# Altium PCB Sinistro_TestBed_RevA-1.PcbDoc (part 2 of 4)
Units mil, origin at the board's own origin, x right, y up, seen from the top; angles counter-clockwise.
Board outline 17000 x 8000 mil, 7 copper layers (Top Layer (*.GTL), MidLayer1 (*.G1), MidLayer2 (*.G2), MidLayer3 (*.G3), DIG GND (*.GP1), AGND (*.GP2), Bottom Layer (*.GBL)); 262 components, 309 nets, 2223 pads, 663 vias.
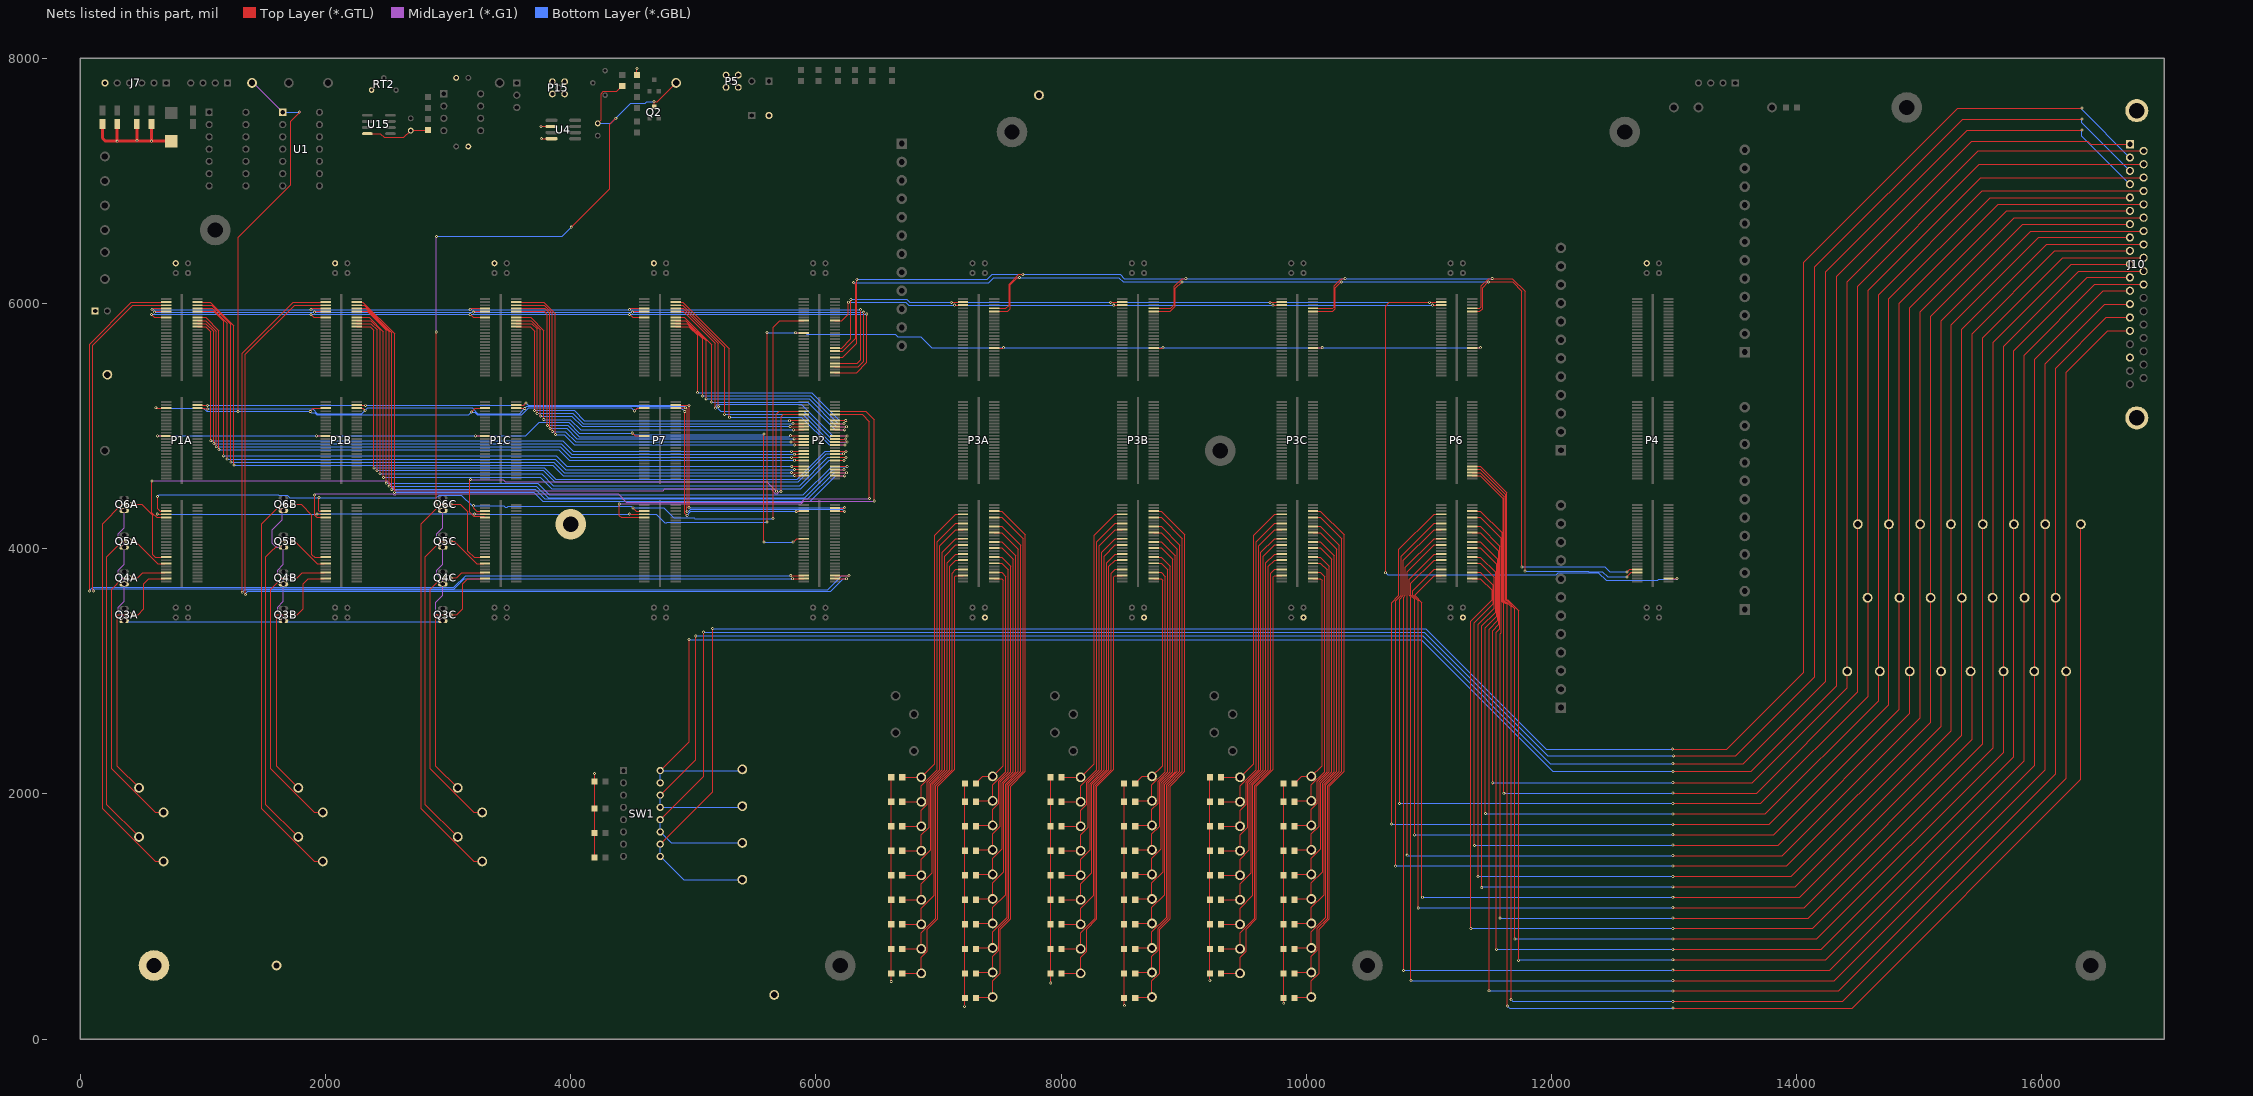
[diagram p7: the nets of this part, all layers, seen from the top]

## Via types
v1: diameter 24, hole 10, Top Layer (*.GTL) to Bottom Layer (*.GBL), 662 vias
v2: diameter 10, hole 10, Top Layer (*.GTL) to Bottom Layer (*.GBL), 1 vias

## Nets (pads, with @x,y where several pads share a name; then routed paths per layer and width w, separated by ;. In a path a pad name is that pad's centre, name@x,y a point inside that pad or via, vN(x,y) a via of type N, cw(c..) or ccw(c..) an arc to the next point about the centre after c; other vN are vias at no path point) (continued)
A: C1A.2 C1B.2 C1C.2 C2A.2 C2B.2 C2C.2 C3A.2 C3B.2 C3C.2 C4A.2 C4B.2 C4C.2 C5A.2 C5B.2 C5C.2 C6A.2 C6B.2 C6C.2 C7A.2 C7B.2 C7C.2 C8A.2 C8B.2 C8C.2 C9A.2 C9B.2 C9C.2 C10A.2 C10B.2 C10C.2 C11A.2 C11B.2 C11C.2 C12A.2 C12B.2 C12C.2 C13A.2 C13B.2 C13C.2 C14A.2 C14B.2 C14C.2 C15A.2 C15B.2 C15C.2 C16A.2 C16B.2 C16C.2 C17A.2 C17B.2 C17C.2 C18A.2 C18B.2 C18C.2 C19A.2 C19B.2 C19C.2 C58.1 C69.1 C70.1 C81.NEG C82.2 C83.1 C84.2 C85.1 D2.1 J7.6 J9.1 J10.17 J10.38 J10.39 P1A.PC07 P1B.PC07 P1C.PC07 P3A.PC07 P3B.PC07 P3C.PC07 P4.PC07 P5.2 P5.3 P5.4 P5.5 P6.PC07 P7.PC07 P15.2 P15.3 P15.4 P15.5 pad.0@600,600 R2.1 R4.1 R8.1 R9.1 R10.1 R11.1 RT2.1 TP114.1 TP115.1 TP116.1 TP117.1 U4.2 U4.4 U15.4 | length 12977.4
  Top Layer (*.GTL) w10: U15.4@2340.51,7386 2447,7386 2478,7355 2639,7355 C58.1@2695,7411 2700,7416 R2.1@2835,7416 ; v1(3757,7446) 3758,7445 U4.2@3843.54,7445 ; v1(3760,7345) U4.4@3843.54,7345 ; v1(4194,2167) 4195,2166 R11.1@4195,1480 ; R4.1@4540,7865 v1(4540,7917) ; v1(6615,470) C11A.2@6615,2136 ; v1(7213,267) 7215,269 C10A.2@7215,2086 ; C11B.2@7915,2136 7915,458 v1(7916,457) ; C10B.2@8515,2086 8515,275 v1(8518,272) ; v1(9214,479) 9215,480 C11C.2@9215,2136 ; C10C.2@9815,2086 9815,294 v1(9817,292)
  Top Layer (*.GTL) w25: C85.1@180,7465 180,7350 205,7325 v1(300,7325) ; C84.2@300,7465 v1(300,7325) ; C83.1@460,7465 460,7330 v1(461,7329) ; C82.2@580,7465 580,7326 v1(581,7325) ; C81.NEG@740,7325 v1(300,7325)
A1OUT: J10.1 SW1.15 SW1.16 TP50.1 | length 18239.5
  Top Layer (*.GTL) w5: v1(12992,2183.08) 13629.92,2183.08 14328,2881.16 14328,6224 15429,7325 16375,7325 16400,7300 J10.1@16720,7300
  Top Layer (*.GTL) w10: SW1.16@4730,2190 4965,2425 v1(4965,3259)
  Bottom Layer (*.GBL) w5: v1(4965,3259) 10937,3259 12012.92,2183.08 v1(12992,2183.08)
  Bottom Layer (*.GBL) w10: SW1.15@4730,2090 SW1.16@4730,2190 5390,2190 TP50.1@5400,2200
A2OUT: J10.4 SW1.13 SW1.14 TP51.1 | length 18635.4
  Top Layer (*.GTL) w5: v1(12991,2246.72) 13566.28,2246.72 14238,2918.44 14238,6261.28 15391.72,7415 v1(16328,7415)
  Top Layer (*.GTL) w10: SW1.14@4730,1990 5020,2280 5020,2538 v1(5020,3289)
  Bottom Layer (*.GBL) w5: v1(5020,3289) 10949.43,3289 11991.71,2246.72 v1(12991,2246.72) ; TP51.1@5390,1890 TP51.1@5400,1900 ; v1(16328,7415) 16328,7365.9 J10.4@16720,6973.9
  Bottom Layer (*.GBL) w10: SW1.14@4730,1990 SW1.13@4730,1890 TP51.1@5390,1890
A3OUT: J10.3 SW1.11 SW1.12 TP52.1 | length 18839.4
  Top Layer (*.GTL) w5: v1(12995,2310.36) 13502.64,2310.36 14148,2955.72 14148,6298.56 15354.44,7505 v1(16328,7505)
  Top Layer (*.GTL) w10: SW1.12@4730,1790 5084,2144 v1(5084,3319)
  Bottom Layer (*.GBL) w5: v1(5084,3319) 10961.85,3319 11970.49,2310.36 v1(12995,2310.36) ; v1(16328,7505) 16328,7474.6 J10.3@16720,7082.6
  Bottom Layer (*.GBL) w10: SW1.12@4730,1790 SW1.11@4730,1690 4820,1600 TP52.1@5400,1600
A4OUT: J10.2 SW1.9 SW1.10 TP53.1 | length 19058.6
  Top Layer (*.GTL) w5: v1(12987,2365.64) 13430.64,2365.64 14058,2993 14058,6335.84 15317.16,7595 v1(16328,7595)
  Top Layer (*.GTL) w10: SW1.10@4730,1590 5158,2018 5158,2544 ; 5158,2538 5158,2544 ; v1(5158,3349) 5158,2544
  Bottom Layer (*.GBL) w5: v1(5158,3349) 10974.28,3349 11957.64,2365.64 v1(12987,2365.64) ; v1(16328,7595) 16328,7583.3 J10.2@16720,7191.3
  Bottom Layer (*.GBL) w10: SW1.10@4730,1590 SW1.9@4730,1490 4920,1300 TP53.1@5400,1300
A_INTERFACE_RESET_N: P1A.47 P1B.47 P1C.47 P2.141 P7.47 | length 7537.8
  Top Layer (*.GTL) w5: v1(4507,4334) 4534.74,4306.26 P7.47@4600.4,4306.26 ; v1(5651,4245) 5651,5807 5705.57,5861.58 P2.141@5900.4,5861.58
  Top Layer (*.GTL) w10: v1(629,4426) 629,4327 649.74,4306.26 P1A.47@700.4,4306.26 ; v1(1946,4417) 1946,4308 1947.74,4306.26 P1B.47@2000.4,4306.26 ; v1(3207,4351) 3207,4332 3232.74,4306.26 P1C.47@3300.4,4306.26
  Bottom Layer (*.GBL) w5: v1(629,4426) 643,4440 1614,4440 1616.04,4437.96 1686.74,4437.96 1707.69,4417 v1(1946,4417) 2904.72,4417 2925.67,4437.96 3108.04,4437.96 3195,4351 v1(3207,4351) 3454.1,4351 3467.34,4337.76 3482.66,4337.76 3490.9,4346 4495,4346 v1(4507,4334) 4759.84,4334 4842.34,4251.5 5006.5,4251.5 5012,4246 5650,4246 v1(5651,4245)
A_SCLK: P1A.143 P1B.143 P1C.143 P2.108 P7.143 | length 7048.4
  Top Layer (*.GTL) w5: v1(580,5910) 603.42,5886.58 P1A.143@700.4,5886.58 ; v1(1880,5911.5) 1904.92,5886.58 P1B.143@2000.4,5886.58 ; v1(3180,5911.5) 3204.93,5886.58 P1C.143@3300.4,5886.58 ; v1(4480,5911.5) 4504.93,5886.58 P7.143@4600.4,5886.58 ; P2.108@6155.52,5436.58 6331.57,5436.58 6415,5520 v1(6415,5915)
  Bottom Layer (*.GBL) w5: v1(580,5910) 581.5,5911.5 6411.5,5911.5 v1(6415,5915)
A_SIMO: P1A.147 P1B.147 P1C.147 P2.112 P7.147 | length 6824.8
  Top Layer (*.GTL) w5: v1(605,5930) 611.58,5936.58 P1A.147@700.4,5936.58 ; v1(1910,5930) 1916.58,5936.58 P1B.147@2000.4,5936.58 ; v1(3205,5930) 3211.57,5936.58 P1C.147@3300.4,5936.58 ; v1(4505,5930) 4511.57,5936.58 P7.147@4600.4,5936.58 ; P2.112@6155.52,5486.58 6346.22,5486.58 6390,5530.36 v1(6390,5930)
  Bottom Layer (*.GBL) w5: v1(605,5930) v1(1910,5930) v1(6390,5930)
A_SOMI: P1A.149 P1B.149 P1C.149 P2.114 P7.149 | length 6906.6
  Top Layer (*.GTL) w5: v1(585,5950) 596.58,5961.58 P1A.149@700.4,5961.58 ; v1(1880,5950) 1891.58,5961.58 P1B.149@2000.4,5961.58 ; v1(3180,5950) 3191.57,5961.58 P1C.149@3300.4,5961.58 ; v1(4480,5950) 4491.57,5961.58 P7.149@4600.4,5961.58 ; P2.114@6155.52,5511.58 6335.86,5511.58 6365,5540.71 v1(6365,5950)
  Bottom Layer (*.GBL) w5: v1(585,5950) v1(6365,5950)
"ANALOG CLOCK DRIVES.P1A_DR": J10.27 P6.152 TP19.1 | length 12813.2
  Top Layer (*.GTL) w5: v1@10944,1157 10944,3559 10884,3619 10884,3622.46 11043,3781.46 P6.152@11100.4,3781.46
  Top Layer (*.GTL) w10: v1(12991,1157) 14025.92,1157 15349,2480.08 TP19.1@15349,3600 15349,5791.08 16040.57,6482.65 J10.27@16831.81,6482.65
  Bottom Layer (*.GBL) w10: v1(12991,1157) v1(10948,1157) ; v1(10948,1157) 10944,1153 v1(10948,1157)
"ANALOG CLOCK DRIVES.P1B_DR": J10.24 P6.142 TP20.1 | length 12405.5
  Top Layer (*.GTL) w5: v1@10884,1667 10884,3589 10854,3619 10854,3717.46 11043,3906.46 P6.142@11100.4,3906.46
  Top Layer (*.GTL) w10: v1(12991,1667) 13814.67,1667 14839,2691.33 14839,6002.33 15646.32,6809.65 J10.24@16831.81,6809.65
  Bottom Layer (*.GBL) w10: v1(10884,1666) 10885,1667 v1(12991,1667)
"ANALOG CLOCK DRIVES.P2A_DR": J10.25 P6.132 TP21.1 | length 12783.6
  Top Layer (*.GTL) w5: v1(10824,1500) 10824,3812.46 11043,4031.46 P6.132@11100.4,4031.46
  Top Layer (*.GTL) w10: v1(12991,1497) 13885.09,1497 15009,2620.91 15009,5931.91 15777.74,6700.65 J10.25@16831.81,6700.65
  Bottom Layer (*.GBL) w10: v1(10824,1500) 10827,1497 v1(12991,1497)
"ANALOG CLOCK DRIVES.P2B_DR": J10.22 P6.122 TP22.1 | length 12533.1
  Top Layer (*.GTL) w5: v1(10761.5,1922) 10761.5,3589 10791.5,3619 10791.5,3904.96 11043,4156.46
  Top Layer (*.GTL) w10: 11043,4156.46 P6.122@11100.4,4156.46 ; v1(12991,1922) 13709.05,1922 14584,2796.95 14584,6107.95 15503.7,7027.65 J10.22@16831.81,7027.65
  Bottom Layer (*.GBL) w10: v1(10761.5,1922) v1(12991,1922)
"ANALOG CLOCK DRIVES.P3A_DR": J10.10 P6.153 TP32.1 | length 12594.5
  Top Layer (*.GTL) w5: v1@11342,902 11342,3407 11518,3583 11518,3659.46 11421,3756.46 P6.153@11355.52,3756.46
  Top Layer (*.GTL) w10: v1(12991,902) 14131.54,902 15604,2374.46 15604,5685.46 16240.24,6321.69 J10.10@16720,6321.69
  Bottom Layer (*.GBL) w10: v1(11343,902) v1(12991,902)
"ANALOG CLOCK DRIVES.P3B_DR": J10.26 P6.143 TP33.1 | length 12281.9
  Top Layer (*.GTL) w5: P6.143@11355.52,3881.46 11421,3881.46 11536,3766.46 11536,3516.15 11402,3382.15 v1@11402,1319
  Top Layer (*.GTL) w10: v1(12991,1327) 13955.5,1327 15179,2550.5 15179,5861.5 15909.15,6591.65 J10.26@16831.81,6591.65
  Bottom Layer (*.GBL) w5: v1(11402,1325) v1@11404,1327
  Bottom Layer (*.GBL) w10: v1@11404,1327 v1(12991,1327)
"ANALOG CLOCK DRIVES.RG_DR": J10.28 P6.113 TP34.1 | length 12836.8
  Top Layer (*.GTL) w5: P6.113@11355.52,4256.46 11421,4256.46 11590,4087.46 11590,3315.59 11582,3307.59 v1@11582,979
  Top Layer (*.GTL) w10: v1(12991,987) 14096.34,987 15519,2409.66 15519,5720.66 16171.99,6373.65 J10.28@16831.81,6373.65
  Bottom Layer (*.GBL) w10: v1(11582,987) v1(12991,987)
"ANALOG CLOCK DRIVES.S1Q1_DR": J10.6 P6.149 TP35.1 | length 11833.6
  Top Layer (*.GTL) w5: P6.149@11355.52,3806.46 11421,3806.46 11527,3700.46 11527,3549.57 11372,3394.57 v1@11372,1579
  Top Layer (*.GTL) w10: v1(12991,1582) 13849.88,1582 14924,2656.12 14924,5967.12 15713.37,6756.5 J10.6@16720,6756.5
  Bottom Layer (*.GBL) w5: v1(11372,1578) v1@11376,1582
  Bottom Layer (*.GBL) w10: v1@11376,1582 v1(12991,1582)
"ANALOG CLOCK DRIVES.S1Q2_DR": J10.8 P6.139 TP36.1 | length 12284.7
  Top Layer (*.GTL) w5: P6.139@11355.52,3931.46 11421,3931.46 11545,3807.46 11545,3482.72 11432,3369.72 v1(11432,1235)
  Top Layer (*.GTL) w10: v1(12991,1242) 13990.71,1242 15264,2515.29 15264,5826.29 15976.81,6539.09 J10.8@16720,6539.09
  Bottom Layer (*.GBL) w5: v1(11432,1235) v1@11439,1242
  Bottom Layer (*.GBL) w10: v1@11439,1242 v1(12991,1242)
"ANALOG CLOCK DRIVES.S1Q3_DR": J10.14 P6.129 TP37.1 | length 13265.5
  Top Layer (*.GTL) w5: P6.129@11355.52,4056.46 11421,4056.46 11563,3914.46 11563,3415.87 11492,3344.87 v1@11492,389
  Top Layer (*.GTL) w10: v1(12991,392) 14342.79,392 16114,2163.21 16114,5474.21 16526.38,5886.59 J10.14@16720,5886.59
  Bottom Layer (*.GBL) w5: v1(11492,394) v1@11494,392
  Bottom Layer (*.GBL) w10: v1@11494,392 v1(12991,392)
"ANALOG CLOCK DRIVES.S1Q4_DR": J10.11 P6.119 TP38.1 | length 12971.1
  Top Layer (*.GTL) w5: P6.119@11355.52,4181.46 11421,4181.46 11581,4021.46 11581,3349.02 11552,3320.02 v1(11552,732)
  Top Layer (*.GTL) w10: v1(12991,732) 14201.96,732 15774,2304.04 TP38.1@15774,4200 15774,5615.04 16371.95,6212.99 J10.11@16720,6212.99
  Bottom Layer (*.GBL) w10: v1(11552,732) v1(12991,732)
"ANALOG CLOCK DRIVES.S2Q1_DR": J10.5 P6.112 TP39.1 | length 12810.2
  Top Layer (*.GTL) w5: v1(10696.5,1754) 10696.5,3559 10756.5,3619 10756.5,3994.96 11043,4281.46
  Top Layer (*.GTL) w10: 11043,4281.46 P6.112@11100.4,4281.46 ; v1(12991,1752) 13779.46,1752 14754,2726.54 14754,6037.54 15581.66,6865.2 J10.5@16720,6865.2
  Bottom Layer (*.GBL) w10: v1(10696.5,1754) 10698.5,1752 v1(12991,1752)
"ANALOG CLOCK DRIVES.S2Q2_DR": J10.9 P6.148 TP40.1 | length 12875.5
  Top Layer (*.GTL) w5: v1(10914,1070) 10914,3574 10869,3619 10869,3657.46 11043,3831.46 P6.148@11100.4,3831.46
  Top Layer (*.GTL) w10: v1(12991,1072) 14061.13,1072 15434,2444.87 15434,5755.87 16108.52,6430.39 J10.9@16720,6430.39
  Bottom Layer (*.GBL) w10: v1(10914,1070) 10916,1072 v1(12991,1072)
"ANALOG CLOCK DRIVES.S2Q3_DR": J10.13 P6.138 TP41.1 | length 13720.4
  Top Layer (*.GTL) w5: v1(10854,476) 10854,3604 10839,3619 10839,3752.46 11043,3956.46 P6.138@11100.4,3956.46
  Top Layer (*.GTL) w10: v1(12991,477) 14307.58,477 16029,2198.42 16029,5509.42 16515.17,5995.59 J10.13@16720,5995.59
  Bottom Layer (*.GBL) w10: v1(10854,476) 10855,477 v1(12991,477)
"ANALOG CLOCK DRIVES.S2Q4_DR": J10.12 P6.128 TP42.1 | length 13844.1
  Top Layer (*.GTL) w5: v1(10794,560) 10794,3604 10809,3619 10809,3847.46 11043,4081.46 P6.128@11100.4,4081.46
  Top Layer (*.GTL) w10: v1(12991,562) 14272.38,562 15944,2233.62 15944,5544.62 16503.67,6104.29 J10.12@16720,6104.29
  Bottom Layer (*.GBL) w10: v1(10794,560) 10796,562 v1(12991,562)
"ANALOG CLOCK DRIVES.S3_DR": J10.7 P6.118 TP43.1 | length 13084
  Top Layer (*.GTL) w5: v1(10729,1410) 10729,3574 10774,3619 10774,3937.46 11043,4206.46 P6.118@11100.4,4206.46
  Top Layer (*.GTL) w10: v1(12991,1412) 13920.29,1412 15094,2585.71 15094,5896.71 15845.09,6647.8 J10.7@16720,6647.8
  Bottom Layer (*.GBL) w10: v1(10729,1410) 10731,1412 v1(12991,1412)
"ANALOG CLOCK DRIVES.SG_DR": J10.21 P6.109 TP44.1 | length 11729
  Top Layer (*.GTL) w5: P6.109@11355.52,4306.46 11421,4306.46 11599,4128.46 11599,3568.09 11612,3555.09 v1@11612,2007
  Top Layer (*.GTL) w10: v1(12991,2007) 13673.84,2007 14499,2832.16 14499,6143.16 15492.49,7136.65 J10.21@16831.81,7136.65
  Bottom Layer (*.GBL) w10: v1(11612,2005) 11614,2007 v1(12991,2007)
"ANALOG CLOCK DRIVES.TGA_DR": J10.23 P6.133 TP45.1 | length 11746.6
  Top Layer (*.GTL) w5: P6.133@11355.52,4006.46 11421,4006.46 11554,3873.46 11554,3449.29 11462,3357.29 v1@11462,1834
  Top Layer (*.GTL) w10: v1(12991,1837) 13744.25,1837 14669,2761.75 14669,6072.75 15514.9,6918.65 J10.23@16831.81,6918.65
  Bottom Layer (*.GBL) w5: v1(11462,1840) v1@11465,1837
  Bottom Layer (*.GBL) w10: v1@11465,1837 v1(12991,1837)
"ANALOG CLOCK DRIVES.TGB_DR": J10.20 P6.123 TP46.1 | length 11588.7
  Top Layer (*.GTL) w5: P6.123@11355.52,4131.46 11421,4131.46 11572,3980.46 11572,3382.44 11522,3332.44 11522,2076
  Top Layer (*.GTL) w10: v1(12991,2092) 13638.63,2092 14414,2867.37 14414,6178.37 15481.28,7245.65 J10.20@16831.81,7245.65
  Bottom Layer (*.GBL) w10: v1(11522,2091) 11523,2092 v1(12991,2092)
"ANALOG CLOCK DRIVES.VDD_DR": P6.101 TP62.1 | length 12029.5
  Top Layer (*.GTL) w5: P6.101@11355.52,4596.61 11421,4596.61 11608,4409.61 11608,3571.82 11623.82,3556 11631.27,3556 11642,3545.27 v1(11642,269)
  Top Layer (*.GTL) w10: v1(12992,253) 14453,253 16320,2120 TP62.1@16320,4200
  Bottom Layer (*.GBL) w10: v1(11642,269) 11661,250 12989,250 v1(12992,253)
"ANALOG CLOCK DRIVES.VOD_DR": J10.30 P6.95 TP47.1 | length 13551.5
  Top Layer (*.GTL) w5: P6.95@11355.52,4671.61 11421,4671.61 11635,4457.61 11635,3583 11642.46,3583 11732,3493.46 v1(11732,642)
  Top Layer (*.GTL) w10: v1(12991,647) 14237.17,647 15859,2268.83 15859,5579.83 16434.82,6155.65 J10.30@16831.81,6155.65
  Bottom Layer (*.GBL) w5: v1(11732,642) v1@11737,647
  Bottom Layer (*.GBL) w10: v1@11737,647 v1(12991,647)
"ANALOG CLOCK DRIVES.VOG_DR": J10.15 P6.99 TP48.1 | length 13733.8
  Top Layer (*.GTL) w5: P6.99@11355.52,4621.61 11421,4621.61 11617,4425.61 11617,3575.54 11627.54,3565 11635,3565 11672,3528 v1(11672,321)
  Top Layer (*.GTL) w10: v1(12991,307) 14378,307 16199,2128 16199,5439 16537.59,5777.59 J10.15@16720,5777.59
  Bottom Layer (*.GBL) w5: v1(11672,321) 11686,307
  Bottom Layer (*.GBL) w10: 11686,307 v1(12991,307)
"ANALOG CLOCK DRIVES.VRD_DR": J10.29 P6.97 TP49.1 | length 13343.1
  Top Layer (*.GTL) w5: P6.97@11355.52,4646.61 11421,4646.61 11626,4441.61 11626,3579.27 11631.27,3574 11638.73,3574 11702,3510.73 v1(11702,816)
  Top Layer (*.GTL) w10: v1(12991,817) 14166.75,817 15689,2339.25 15689,5650.25 16303.4,6264.65 J10.29@16831.81,6264.65
  Bottom Layer (*.GBL) w5: v1(11702,816) v1@11703,817
  Bottom Layer (*.GBL) w10: v1@11703,817 v1(12991,817)
ASP_1_DAT0: P1A.154 P2.55 | length 6197.1
  Top Layer (*.GTL) w5: P1A.154@955.52,6011.58 1060.42,6011.58 1252,5820 v1(1252,4683) ; v1(5827,4597) 5827.58,4596.42 P2.55@5900.4,4596.42
  Bottom Layer (*.GBL) w5: v1(1252,4683) 3851.99,4683 3937.99,4597 v1(5827,4597)
ASP_1_DAT1: P1A.152 P2.57 | length 6169.9
  Top Layer (*.GTL) w5: P1A.152@955.52,5986.58 1072.7,5986.58 1227,5832.27 v1(1227,4707) ; v1(5802,4621) 5802.42,4621.42 P2.57@5900.4,4621.42
  Bottom Layer (*.GBL) w5: v1(1227,4707) 3861.93,4707 3947.93,4621 v1(5802,4621)
ASP_1_DAT2: P1A.150 P2.59 | length 6139.6
  Top Layer (*.GTL) w5: P1A.150@955.52,5961.58 1076.42,5961.58 1197,5841 v1(1197,4732) ; v1(5825,4646) 5825.42,4646.42 P2.59@5900.4,4646.42
  Bottom Layer (*.GBL) w5: v1(1197,4732) 3872.28,4732 3958.28,4646 v1(5825,4646)
ASP_1_DAT3: P1A.148 P2.61 | length 6112.3
  Top Layer (*.GTL) w5: P1A.148@955.52,5936.58 1088.7,5936.58 1169,5856.27 v1(1169,4758) ; v1(5803,4672) 5803.58,4671.42 P2.61@5900.4,4671.42
  Bottom Layer (*.GBL) w5: v1(1169,4758) 3883.05,4758 3969.05,4672 v1(5803,4672)
ASP_1_DAT4: P1A.144 P2.65 | length 5995.7
  Top Layer (*.GTL) w5: P1A.144@955.52,5886.58 1020.42,5886.58 1129,5778 v1(1129,4808) ; v1(5825,4722) 5825.58,4721.42 P2.65@5900.4,4721.42
  Bottom Layer (*.GBL) w5: v1(1129,4808) 3903.76,4808 3989.76,4722 v1(5825,4722)
ASP_1_DAT5: P1A.142 P2.67 | length 5959.5
  Top Layer (*.GTL) w5: P1A.142@955.52,5861.58 1021.42,5861.58 1108,5775 v1(1108,4832) ; v1(5802,4746) 5802.42,4746.42 P2.67@5900.4,4746.42
  Bottom Layer (*.GBL) w5: v1(1108,4832) 3913.7,4832 3999.7,4746 v1(5802,4746)
ASP_1_DAT6: P1A.140 P2.69 | length 5923
  Top Layer (*.GTL) w5: P1A.140@955.52,5836.58 1024.42,5836.58 1088,5773 v1(1088,4857) ; v1(5824,4771) 5824.42,4771.42 P2.69@5900.4,4771.42
  Bottom Layer (*.GBL) w5: v1(1088,4857) 3924.06,4857 4010.06,4771 v1(5824,4771)
ASP_1_DAT7: P1A.138 P2.71 | length 5887.3
  Top Layer (*.GTL) w5: P1A.138@955.52,5811.58 1022.42,5811.58 1064,5770 v1(1064,4881) ; v1(5801,4795) 5802.42,4796.42 P2.71@5900.4,4796.42
  Bottom Layer (*.GBL) w5: v1(1064,4881) 3934,4881 4020,4795 v1(5801,4795)
ASP_1_SEL_N: P1A.43 P2.95 | length 6395.2
  Top Layer (*.GTL) w5: v1(583,4552) 583,4295.24 621.98,4256.26 P1A.43@700.4,4256.26 ; v1(5716,4468) 5716,5077 5735.42,5096.42 P2.95@5900.4,5096.42
  MidLayer1 (*.G1) w5: v1(583,4552) 583.92,4552.92 2182.66,4552.92 2183.25,4553.5 2502.66,4553.5 2537.5,4518.66 2537.5,4513.66 2577.16,4474 4752.84,4474 4767.34,4488.5 5632.34,4488.5 5670.34,4450.5 5685.66,4450.5 5709.16,4474 5710,4474 v1(5716,4468)
ASP_2_DAT0: P1B.154 P2.56 | length 5583.8
  Top Layer (*.GTL) w5: P1B.154@2255.52,6011.58 2303.42,6011.58 2563,5752 v1@2563,4450 ; P2.56@6155.52,4596.42 6233.58,4596.42 v1(6235,4595)
  Bottom Layer (*.GBL) w5: v1(2563,4460) 3700,4460 3771,4389 5954,4389 6160,4595 v1(6235,4595)
ASP_2_DAT1: P1B.152 P2.58 | length 5588
  Top Layer (*.GTL) w5: P1B.152@2255.52,5986.58 2315.36,5986.58 2540,5761.94 v1(2540,4485) ; P2.58@6155.52,4621.42 6156.94,4620 v1(6250,4620) v1@6245,4615
  Bottom Layer (*.GBL) w5: v1(2540,4485) 3710.36,4485 3789.36,4406 5935.64,4406 6149.64,4620 v1(6250,4620)
ASP_2_DAT2: P1B.150 P2.60 | length 5530.4
  Top Layer (*.GTL) w5: P1B.150@2255.52,5961.58 2327.17,5961.58 2519,5769.75 v1(2519,4510) ; P2.60@6155.52,4646.42 6156.94,4645 v1(6230,4645) v1@6235,4640
  Bottom Layer (*.GBL) w5: v1(2519,4510) 3720.71,4510 3815.71,4415 5909.29,4415 6139.29,4645 v1(6230,4645)
ASP_2_DAT3: P1B.148 P2.62 | length 5544.4
  Top Layer (*.GTL) w5: P1B.148@2255.52,5936.58 2339.11,5936.58 2495,5780.68 v1(2495,4535) ; P2.62@6155.52,4671.42 6253.58,4671.42 v1(6255,4670)
  Bottom Layer (*.GBL) w5: v1(2495,4535) 3731.07,4535 3826.07,4440 5898.93,4440 6128.93,4670 v1(6255,4670)
ASP_2_DAT4: P1B.144 P2.66 | length 5425.7
  Top Layer (*.GTL) w5: P1B.144@2255.52,5886.58 2357.42,5886.58 2472,5772 v1(2472,4580) ; P2.66@6155.52,4721.42 6228.58,4721.42 v1(6230,4720)
  Bottom Layer (*.GBL) w5: v1(2472,4580) 2477,4585 3751.78,4585 3846.78,4490 5878.22,4490 6108.22,4720 v1(6230,4720)
ASP_2_DAT5: P1B.142 P2.68 | length 5425.5
  Top Layer (*.GTL) w5: P1B.142@2255.52,5861.58 2369.21,5861.58 2445,5785.78 v1(2445,4615) ; P2.68@6155.52,4746.42 6156.94,4745 v1(6245,4745) v1@6240,4740
  Bottom Layer (*.GBL) w5: v1(2445,4615) 2450,4610 3762.13,4610 3857.13,4515 5867.87,4515 6097.87,4745 v1(6245,4745)
ASP_2_DAT6: P1B.140 P2.70 | length 5351.4
  Top Layer (*.GTL) w5: P1B.140@2255.52,5836.58 2368.42,5836.58 2420,5785 v1@2420,4630 ; P2.70@6155.52,4771.42 6221.42,4771.42 v1(6225,4775)
  Bottom Layer (*.GBL) w5: v1(2420,4640) 2775,4640 3774.56,4640 3869.56,4545 5855.44,4545 6085.44,4775 v1(6225,4775)
ASP_2_DAT7: P1B.138 P2.72 | length 5349.6
  Top Layer (*.GTL) w5: P1B.138@2255.52,5811.58 2366.42,5811.58 2394,5784 v1(2394,4660) ; P2.72@6155.52,4796.42 6243.58,4796.42 v1(6245,4795)
  Bottom Layer (*.GBL) w5: v1(2394,4660) 3782.84,4660 3877.84,4565 5847.16,4565 6077.16,4795 v1(6245,4795)
ASP_2_SEL_N: P1B.43 P2.96 | length 5772.1
  Top Layer (*.GTL) w5: P2.96@6155.52,5096.42 6377.58,5096.42 6437,5037 v1(6437,4409)
  Top Layer (*.GTL) w10: v1(1910,4439) 1910,4274.3 1928.04,4256.26 P1B.43@2000.4,4256.26
  MidLayer1 (*.G1) w5: v1(1910,4439) 1918,4447 2549.84,4447 2555.34,4441.5 2570.66,4441.5 2576.16,4447 4386,4447 4454,4379 5880,4379 5910,4409 v1(6437,4409)
  other v1: 6437,4409
ASP_3_DAT0: P1C.154 P2.75 | length 3403.9
  Top Layer (*.GTL) w5: P1C.154@3555.52,6011.58 3778.43,6011.58 3875,5915 v1(3875,4931) ; v1(5824,4847) 5824.58,4846.42 P2.75@5900.4,4846.42
  Bottom Layer (*.GBL) w5: v1(3875,4931) 3945.4,4931 4029.4,4847 v1(5824,4847)
ASP_3_DAT1: P1C.152 P2.77 | length 3377.6
  Top Layer (*.GTL) w5: P1C.152@3555.52,5986.58 3783.43,5986.58 3850,5920 v1(3850,4955.42) ; v1@5797,4872 5797.42,4871.58 v1(5797.42,4871.42) P2.77@5900.4,4871.42
  Bottom Layer (*.GBL) w5: v1@3845,4955.42 v1(3850,4955.42) 3955.51,4955.42 4039.51,4871.42 v1(5797.42,4871.42)
ASP_3_DAT2: P1C.150 P2.79 | length 3336.1
  Top Layer (*.GTL) w5: P1C.150@3555.52,5961.58 3788.43,5961.58 3830,5920 v1(3830,4981) ; v1(5823,4897) 5823.58,4896.42 P2.79@5900.4,4896.42
  Bottom Layer (*.GBL) w5: v1(3830,4981) 3966.11,4981 4050.11,4897 v1(5823,4897)
ASP_3_DAT3: P1C.148 P2.81 | length 3307.4
  Top Layer (*.GTL) w5: P1C.148@3555.52,5936.58 3783.43,5936.58 3810,5910 v1(3810,5006) ; v1(5792,4922) 5792.58,4921.42 P2.81@5900.4,4921.42
  Bottom Layer (*.GBL) w5: v1@3805,5006 v1(3810,5006) 3976.47,5006 4069.47,4913 5783,4913 v1(5792,4922)
ASP_3_DAT4: P1C.144 P2.85 | length 3155.4
  Top Layer (*.GTL) w5: P1C.144@3555.52,5886.58 3673.43,5886.58 3780,5780 v1(3780,5054) ; v1(5817,4970) 5818.42,4971.42 P2.85@5900.4,4971.42
  Bottom Layer (*.GBL) w5: v1@3775,5054 v1(3780,5054) 3996.35,5054 4080.35,4970 v1(5817,4970)
ASP_3_DAT5: P1C.142 P2.87 | length 3116.8
  Top Layer (*.GTL) w5: P1C.142@3555.52,5861.58 3678.43,5861.58 3752,5788 v1(3752,5082) ; v1(5790,4998) 5791.58,4996.42 P2.87@5900.4,4996.42
  Bottom Layer (*.GBL) w5: v1(3752,5082) 4007.95,5082 4091.95,4998 v1(5790,4998)
ASP_3_DAT6: P1C.140 P2.89 | length 3087.9
  Top Layer (*.GTL) w5: P1C.140@3555.52,5836.58 3683.43,5836.58 3726,5794 v1(3726,5104) ; v1(5814,5020) 5816,5020 5817.42,5021.42 P2.89@5900.4,5021.42
  Bottom Layer (*.GBL) w5: v1(3726,5104) 4017.06,5104 4101.06,5020 v1(5814,5020)
ASP_3_DAT7: P1C.138 P2.91 | length 3042.8
  Top Layer (*.GTL) w5: P1C.138@3555.52,5811.58 3557.09,5810 3670,5810 3705,5775 v1(3705,5128) ; v1(5784,5044) 5786.42,5046.42 P2.91@5900.4,5046.42
  Bottom Layer (*.GBL) w5: v1(3705,5128) 4027,5128 4111,5044 v1(5784,5044)
ASP_3_SEL_N: P1C.43 P2.97 | length 3804.1
  Top Layer (*.GTL) w5: v1(3182,4564) 3178,4560 3178,4296 3197.5,4276.5 3197.5,4276.34 3208.34,4265.5 3291.16,4265.5 P1C.43@3300.4,4256.26 ; v1(5678,4469) 5678,5096.42 5703,5121.42 P2.97@5900.4,5121.42
  MidLayer1 (*.G1) w5: v1(3182,4564) 3449.84,4564 3467.34,4546.5 5600.5,4546.5 v1(5678,4469)
ASP_4_DAT0: P2.76 P7.154 | length 2270.8
  Top Layer (*.GTL) w5: P7.154@4855.52,6011.58 4913.43,6011.58 5295,5630 v1(5295,5072.83) ; P2.76@6155.52,4846.42 v1(6236.42,4846.42)
  Bottom Layer (*.GBL) w5: v1(5295,5072.83) 5882.17,5072.83 6108.58,4846.42 v1(6236.42,4846.42)
ASP_4_DAT1: P2.78 P7.152 | length 2283.4
  Top Layer (*.GTL) w5: P7.152@4855.52,5986.58 4913.43,5986.58 5255,5645 v1(5255,5096.42) ; P2.78@6155.52,4871.42 6253.58,4871.42 v1(6255,4870)
  Bottom Layer (*.GBL) w5: v1(5255,5096.42) 5891.93,5096.42 6118.35,4870 v1(6255,4870)
ASP_4_DAT2: P2.80 P7.150 | length 2231
  Top Layer (*.GTL) w5: P7.150@4855.52,5961.58 4918.43,5961.58 5204.32,5675.68 v1(5204.32,5161.7) ; P2.80@6155.52,4896.42 6156.94,4895 v1(6240,4895) v1@6245,4890
  Bottom Layer (*.GBL) w5: v1(5204.32,5161.7) 5204.32,5142.1 5225,5121.42 5902.29,5121.42 6128.71,4895 v1(6240,4895)
ASP_4_DAT3: P2.82 P7.148 | length 2302.7
  Top Layer (*.GTL) w5: P7.148@4889.91,5936.58 P7.148@4855.52,5936.58 4918.43,5936.58 5180,5675 v1(5180,5146.42) ; P2.82@6155.52,4921.42 6253.58,4921.42 v1(6255,4920)
  Bottom Layer (*.GBL) w5: v1(5180,5146.42) 5185.82,5152.23 5185.82,5169.36 5196.65,5180.2 5878.86,5180.2 6139.06,4920 v1(6255,4920)
ASP_4_DAT4: P2.86 P7.144 | length 2112.6
  Top Layer (*.GTL) w5: P7.144@4855.52,5886.58 4926.61,5886.58 5150,5663.18 v1(5150,5196.42) ; P2.86@6155.52,4971.42 6233.58,4971.42 v1(6235,4970)
  Bottom Layer (*.GBL) w5: v1(5150,5196.42) 5933.35,5196.42 6159.77,4970 v1(6235,4970)
ASP_4_DAT5: P2.88 P7.142 | length 2123.3
  Top Layer (*.GTL) w5: P7.142@4855.52,5861.58 4938.88,5861.58 5105,5695.46 v1(5105,5222.83) ; P2.88@6155.52,4996.42 6248.58,4996.42 v1(6250,4995)
  Bottom Layer (*.GBL) w5: v1(5105,5222.83) 5944.3,5222.83 6170.71,4996.42 v1@6248.58,4996.42
ASP_4_DAT6: P2.90 P7.140 | length 2060.9
  Top Layer (*.GTL) w5: P7.140@4855.52,5836.58 4951.15,5836.58 5075,5712.73 v1(5075,5246.42) ; P2.90@6155.52,5021.42 6228.58,5021.42 v1(6230,5020)
  Bottom Layer (*.GBL) w5: v1(5075,5246.42) 5954.07,5246.42 6180.48,5020 v1(6230,5020)
ASP_4_DAT7: P2.92 P7.138 | length 2075.8
  Top Layer (*.GTL) w5: P7.138@4855.52,5811.58 4963.43,5811.58 5035,5740 v1(5035,5272.84) ; P2.92@6155.52,5046.42 v1(6243.58,5046.42) v1@6250,5040
  Bottom Layer (*.GBL) w5: v1(5035,5272.84) 5965.01,5272.84 6191.43,5046.42 v1(6243.58,5046.42)
ASP_4_SEL_N: P2.98 P7.43 | length 3408.4
  Top Layer (*.GTL) w5: v1(4396,4366) 4396,4271 4410.74,4256.26 P7.43@4600.4,4256.26 ; P2.98@6155.52,5121.42 6408.58,5121.42 6476,5054 v1(6476,4389)
  MidLayer1 (*.G1) w5: v1(4396,4366) 5880,4366 5903,4389 v1(6476,4389)
ASP_BRD_I/O.CONVST: P1A.81 P1B.81 P1C.81 P2.29 P7.81 | length 6583.9
  Top Layer (*.GTL) w5: v1(629.58,4921.42) P1A.81@700.4,4921.42 ; v1(1927,4921.42) P1B.81@2000.4,4921.42 ; v1(3222,4921.42) P1C.81@3300.4,4921.42 ; v1(4502,4944) 4524.58,4921.42 P7.81@4600.4,4921.42 ; v1(5576,4935) 5576,4110 5576,4055 v1(5577,4054) ; v1(5815,4054) 5842.26,4081.26 P2.29@5900.4,4081.26
  Bottom Layer (*.GBL) w5: v1(629.58,4921.42) v1(1927,4921.42) v1(3222,4921.42) 3632.42,4921.42 3742,5031 3983,5031 4070,4944 v1(4502,4944) 4518.08,4927.92 5568.92,4927.92 v1(5576,4935) ; v1(5577,4054) v1(5815,4054)
ASP_BRD_I/O.DC_HOLD: P1A.99 P1B.99 P1C.99 P2.47 P7.99 TP56.1 U1.1 | length 9823.9
  Top Layer (*.GTL) w5: v1(615,5150) 618.58,5146.42 P1A.99@700.4,5146.42 ; v1(1875,5120) 1901.42,5146.42 P1B.99@2000.4,5146.42 ; v1(3190,5115) 3221.42,5146.42 P1C.99@3300.4,5146.42 ; v1(4520,5125) 4541.42,5146.42 P7.99@4600.4,5146.42 ; v1(4930,5120) 4930,4290 v1(4950,4270) ; v1(5840,4305) 5841.26,4306.26 P2.47@5900.4,4306.26
  Top Layer (*.GTL) w10: v1(1286,5120) 1286,6541.51 1714,6969.51 1714,7487 v1(1789,7562)
  MidLayer1 (*.G1) w10: TP56.1@1400,7800 1410,7800 U1.1@1650,7560
  Bottom Layer (*.GBL) w5: v1(615,5150) 618.58,5146.42 1002.42,5146.42 1028.84,5120 v1(1875,5120) 1885,5110 1912.27,5110 1928.35,5093.92 3168.92,5093.92 v1(3190,5115) 3217.27,5115 3238.35,5093.92 3598.92,5093.92 3631.5,5126.5 3632.66,5126.5 3657.79,5151.62 4493.38,5151.62 v1(4520,5125) 4546.57,5151.57 4898.43,5151.57 v1(4930,5120) ; v1(4950,4270) 4945,4270 4980,4305 v1(5840,4305)
  Bottom Layer (*.GBL) w10: U1.1@1650,7560 1787,7560 v1(1789,7562)
ASP_BRD_I/O.GAIN_4X: P1A.102 P1B.102 P1C.102 P2.50 P7.102 | length 6479.9
  Top Layer (*.GTL) w5: P1A.102@955.52,5171.42 956.94,5170 v1(1035,5170) ; P1B.102@2255,5170 v1(2325,5170) ; P1C.102@3555.52,5171.42 3616.42,5171.42 v1(3635,5190) ; P7.102@4855.52,5171.42 4856.94,5170 v1(4965,5170) v1(4965,4335) ; P2.50@6155.52,4331.26 6231.26,4331.26 v1(6235,4335)
  Bottom Layer (*.GBL) w5: v1(1035,5170) v1(2325,5170) 3615,5170 v1(3635,5190) 3655,5170 v1(4965,5170) ; v1(4965,4335) v1(6235,4335)
ASP_BRD_I/O.RESET_BLANK: P1A.100 P1B.100 P1C.100 P2.48 P7.100 | length 6534.5
  Top Layer (*.GTL) w5: P1A.100@955.52,5146.42 1008.58,5146.42 1015,5140 v1(1035,5140) v1@1040,5140 ; P1B.100@2255.52,5146.42 2303.58,5146.42 v1@2320,5130 ; P1C.100@3555.52,5146.42 3556.94,5145 v1(3625,5145) ; P7.100@4855.52,5146.42 4859.1,5150 v1(4935,5150) 4940,5150 4950,5140 4950,4346.16 4946.5,4342.66 4946.5,4308.5 v1(4950,4305) ; P2.48@6155.52,4306.26 6233.74,4306.26 v1(6235,4305) v1@6235,4310
  Bottom Layer (*.GBL) w5: v1(1035,5140) 1895,5140 1932.08,5102.92 2297.08,5102.92 2344.17,5150 3195,5150 3242.08,5102.92 3582.92,5102.92 v1(3625,5145) 3640.62,5160.62 4924.38,5160.62 v1(4935,5150) ; v1(4950,4305) 4961.5,4305 4980,4323.5 6216.5,4323.5 v1(6235,4305)
  other v1: 2323.28,5129.12
ASP_BRD_I/O.S_WIRED_1: P1A.45 P1B.45 P1C.45 P2.133 P3A.33 P3B.33 P3C.33 P6.33 P7.45 pad.5 | length 13136.2
  Top Layer (*.GTL) w5: v1(627,4283) P1A.45@699,4283 ; v1(1931,4283) 1998.66,4283 P1B.45@2000.4,4281.26 ; v1(3216,4284) 3300,4284 P1C.45@3301,4283 ; v1(4481,4283) 4482.74,4281.26 P7.45@4600.4,4281.26 ; v1(5601,5763) 5602,5762 v1(5602,4218) ; v1@5835.43,5761.58 P2.133@5900.4,5761.58 ; P3A.33@7455.52,5636.77 7527.77,5636.77 v1(7531,5640) v1@7531,5639 ; P3B.33@8755.52,5636.77 8827.77,5636.77 v1@8830,5639 ; P3C.33@10056.52,5637.77 v1@10128.77,5637.77 ; P6.33@11348.52,5637.77 v1@11420.77,5637.77
  Bottom Layer (*.GBL) w5: v1(627,4283) v1(1931,4283) 1932,4284 v1(3216,4284) 3217,4283 v1(4481,4283) 4697.1,4283 4767.34,4212.76 4782.66,4212.76 4787.9,4218 v1(5602,4218) ; v1(5601,5763) 5834,5763 v1(5835,5762) 5913,5762 5924.92,5750.08 6646.31,5750.08 6652.37,5744.01 6668.19,5728.19 6855.12,5728.19 6944.31,5639 8831,5639 v1@11423,5639
  other v1: 8831,5640 10131,5640 11423,5640
ASP_BRD_I/O.VIDEO: C71.2 Q2.1 Q3A.3 Q3B.3 Q3C.3 Q4A.3 Q4B.3 Q4C.3 Q5A.3 Q5B.3 Q5C.3 Q6A.3 Q6B.3 Q6C.3 R6.2 TP54.1 | length 11448.8
  Top Layer (*.GTL) w10: v1(2903,4364.98) v1(2903,5768) ; v1@4004.5,6622.5 4317,6935 4317,7461 v1(4368,7512) ; C71.2@4220,7470 4248.5,7498.5 4248.5,7713.05 4266.95,7731.5 4376.5,7731.5 R6.2@4420,7775 ; Q2.1@4680,7606.26 v1(4680,7647) 4707,7647 TP54.1@4860,7800
  MidLayer1 (*.G1) w10: Q3A.3@356.2,3411.77 356.2,3441.52 307.83,3489.89 307.83,3523.65 356.2,3572.02 Q4A.3@356.2,3711.77 356.2,3741.52 307.83,3789.89 307.83,3823.65 356.2,3872.02 Q5A.3@356.2,4011.77 356.2,4041.52 307.83,4089.89 307.83,4123.65 356.2,4172.02 Q6A.3@356.2,4311.77 ; Q3B.3@1656.2,3411.77 1656.2,3441.52 1607.83,3489.89 1607.83,3523.65 1656.2,3572.02 Q4B.3@1656.2,3711.77 1656.2,3741.52 1607.83,3789.89 1607.83,3823.65 1656.2,3872.02 Q5B.3@1656.2,4011.77 1597.95,4011.77 1563,4046.72 1563,4154 1647,4238 1647,4302.57 Q6B.3@1656.2,4311.77 ; v1(2903,4364.98) Q6C.3@2956.2,4311.77 2956.2,4172.02 2907.83,4123.65 2907.83,4089.89 2956.2,4041.52 2956.2,3872.02 2907.83,3823.65 2907.83,3789.89 2956.2,3741.52 2956.2,3620.2 2900,3564 2900,3467.98 Q3C.3@2956.2,3411.77 ; v1(2903,5768) 2903,6547 v1(2904,6548)
  Bottom Layer (*.GBL) w10: Q3A.3@356.2,3411.77 362.96,3405.02 1649.45,3405.02 Q3B.3@1656.2,3411.77 1662.96,3405.02 2949.45,3405.02 Q3C.3@2956.2,3411.77 ; v1(2904,6548) 3929,6548 v1(4004,6623) ; C71.2@4220,7470 4326,7470 v1(4368,7512) 4489,7633 4607.7,7633 4621.7,7647 v1(4680,7647)
B_INTERFACE_RESET_N: P2.142 P3A.6 P3B.6 P3C.6 P6.6 | length 5285.1
  Top Layer (*.GTL) w5: P2.142@6155.52,5861.58 6212.57,5861.58 6265,5914 v1(6265,6011) ; v1(7130,5987) 7130.23,5986.77 P3A.6@7200.4,5986.77 ; v1(8430,5987) 8430.23,5986.77 P3B.6@8500.4,5986.77 ; v1(9730,5987) 9730.23,5986.77 P3C.6@9800.4,5986.77 ; v1(11030,5987) 11030.23,5986.77 P6.6@11100.4,5986.77
  Bottom Layer (*.GBL) w5: v1(6265,6011) 6732.47,6011 6756.47,5987 v1(7130,5987) v1(8430,5987) v1(9730,5987) v1(11030,5987)
B_SCLK: P2.118 P3A.7 P3B.7 P3C.7 P4.7 P6.7 | length 11246.4
  Top Layer (*.GTL) w5: P2.118@6155.52,5561.58 6217.84,5561.58 6334,5677.73 6334,6196 6332,6198 v1(6334,6198) ; P3A.7@7455.52,5961.77 7550.77,5961.77 7576,5987 7576,6158.46 7655.54,6238 7678,6238 v1@7685.5,6230.5 ; v1@7685,6231 v1@7685.5,6230.5 ; v1(7688,6239) v1@7685.5,6230.5 ; P3B.7@8755.52,5961.77 8893.77,5961.77 8924,5992 8924,6140.16 8988.34,6204.5 v1(9018,6204.5) ; P3C.7@10055.52,5961.77 10217.84,5961.77 10228,5971.93 10228,6144.16 10279.34,6195.5 10280,6195.5 10289,6204.5 ; 10288.34,6204.5 10289,6204.5 ; v1(10318,6204.5) 10289,6204.5 ; P6.7@11355.52,5961.77 11417.84,5961.77 11430,5973.93 11430,6146.16 11488.34,6204.5 v1(11518,6204.5) 11680.5,6204.5 11785,6100 v1(11785,3817) ; v1(12617,3770) 12653.26,3806.26 P4.7@12700.4,3806.26
  Bottom Layer (*.GBL) w5: v1@6332,6198 v1(6334,6198) 7398,6198 7439.5,6239.5 8482.62,6239.5 8517.62,6204.5 v1(9018,6204.5) v1(10318,6204.5) v1(11518,6204.5) ; v1(11785,3817) 12302,3817 12306.18,3812.82 12416.19,3812.82 12459.01,3770 v1(12617,3770)
B_SIMO: P2.122 P3A.9 P3B.9 P3C.9 P4.9 P6.9 | length 11064.7
  Top Layer (*.GTL) w5: P2.122@6155.52,5611.58 6217.84,5611.58 6324,5717.73 6324,6154.5 v1(6308,6170.5) ; P3A.9@7455.52,5936.77 7565.77,5936.77 7585,5956 7585,6154.73 7642.27,6212 v1(7660,6212) 7660,6213 v1@7659,6213 ; P3B.9@8755.52,5936.77 8889.91,5936.77 8933,5979.86 8933,6123 v1(8987,6177) ; P3C.9@10055.52,5936.77 10217.84,5936.77 10238,5956.93 10238,6128 v1(10287,6177) ; P6.9@11355.52,5936.77 11417.84,5936.77 11440,5958.93 11440,6131 v1@11486,6177 ; 11534,6177 v1(11487,6177) 11684,6177 11759,6102 v1(11759,3851) ; v1(12618,3811) 12638.26,3831.26 P4.9@12700.4,3831.26
  Bottom Layer (*.GBL) w5: v1(6308,6170.5) 7409.39,6170.5 7450.89,6212 v1(7660,6212) 8471.23,6212 8506.23,6177 v1(8987,6177) v1(10287,6177) v1(11487,6177) v1@11486,6177 ; v1(11759,3851) 12436,3851 12476,3811 v1(12618,3811)
B_SOMI: P2.124 P3A.4 P3B.4 P3C.4 P4.4 P6.4 | length 10640.5
  Top Layer (*.GTL) w5: P2.124@6155.52,5636.58 6209.57,5636.58 6285,5712 v1(6285,6034) ; v1(7105,6010) 7106.77,6011.77 P3A.4@7200.4,6011.77 ; v1(8405,6010) 8406.77,6011.77 P3B.4@8500.4,6011.77 ; v1(9705,6010) 9706.77,6011.77 P3C.4@9800.4,6011.77 ; v1(10647,3804) 10647,5979 10678,6010 v1(11005,6010) 11006.77,6011.77 P6.4@11100.4,6011.77 ; P4.4@12955.52,3756.26 13025.26,3756.26 v1(13026,3757) v1@13026,3756
  Bottom Layer (*.GBL) w5: v1(6285,6034) 6742,6034 6766,6010 v1(7105,6010) v1(8405,6010) v1(9705,6010) v1(11005,6010) ; v1(10647,3804) 10664,3787 10980,3787 12040.51,3787 12057.33,3803.82 12384.18,3803.82 12447,3741 12868.38,3741 12877.34,3749.96 13018.96,3749.96 v1(13026,3757)
CDO1A: C9A.1 P3A.149 TP17A.1 | length 2112.8
  Top Layer (*.GTL) w10: C9A.1@7312,1943 TP17A.1@7442,1943 7442,2073.7 7550,2181.7 7550,3772.46 7516,3806.46 P3A.149@7455.52,3806.46
CDO1B: C9B.1 P3B.149 TP17B.1 | length 2112.8
  Top Layer (*.GTL) w10: C9B.1@8612,1943 TP17B.1@8742,1943 8742,2073.7 8850,2181.7 8850,3772.46 8816,3806.46 P3B.149@8755.52,3806.46
CDO1C: C9C.1 P3C.149 TP17C.1 | length 2112.8
  Top Layer (*.GTL) w10: C9C.1@9912,1943 TP17C.1@10042,1943 10042,2073.7 10150,2181.7 10150,3772.46 10116,3806.46 P3C.149@10055.52,3806.46
CDO2A: C7A.1 P3A.139 TP15A.1 | length 2670.9
  Top Layer (*.GTL) w10: C7A.1@7312,1543 TP15A.1@7442,1543 7442,1673.7 7505,1736.7 7505,2097.11 7590,2182.11 7590,3857.46 7516,3931.46 P3A.139@7455.52,3931.46
CDO2B: C7B.1 P3B.139 TP15B.1 | length 2670.9
  Top Layer (*.GTL) w10: C7B.1@8612,1543 TP15B.1@8742,1543 8742,1673.7 8805,1736.7 8805,2097.11 8890,2182.11 8890,3857.46 8816,3931.46 P3B.139@8755.52,3931.46
CDO2C: C7C.1 P3C.139 TP15C.1 | length 2670.9
  Top Layer (*.GTL) w10: C7C.1@9912,1543 TP15C.1@10042,1543 10042,1673.7 10105,1736.7 10105,2097.11 10190,2182.11 10190,3857.46 10116,3931.46 P3C.139@10055.52,3931.46
CDO3A: C5A.1 P3A.129 TP13A.1 | length 3238.9
  Top Layer (*.GTL) w10: C5A.1@7305,1136 7312,1143 TP13A.1@7442,1143 7442,1273.7 7533,1364.7 7533,2085.51 7630,2182.51 7630,3942.46 7516,4056.46 P3A.129@7455.52,4056.46
CDO3B: C5B.1 P3B.129 TP13B.1 | length 3238.9
  Top Layer (*.GTL) w10: C5B.1@8605,1136 8612,1143 TP13B.1@8742,1143 8742,1273.7 8833,1364.7 8833,2085.51 8930,2182.51 8930,3942.46 8816,4056.46 P3B.129@8755.52,4056.46
CDO3C: C5C.1 P3C.129 TP13C.1 | length 3238.9
  Top Layer (*.GTL) w10: C5C.1@9905,1136 9912,1143 TP13C.1@10042,1143 10042,1273.7 10133,1364.7 10133,2085.51 10230,2182.51 10230,3942.46 10116,4056.46 P3C.129@10055.52,4056.46
CDO4A: C3A.1 P3A.119 TP11A.1 | length 3787.2
  Top Layer (*.GTL) w10: C3A.1@7312,743 TP11A.1@7442,743 7442,873.7 7561,992.7 7561,2073.91 7670,2182.91 7670,4027.46 7516,4181.46 P3A.119@7455.52,4181.46
CDO4B: C3B.1 P3B.119 TP11B.1 | length 3787.2
  Top Layer (*.GTL) w10: C3B.1@8612,743 TP11B.1@8742,743 8742,873.7 8861,992.7 8861,2073.91 8970,2182.91 8970,4027.46 8816,4181.46 P3B.119@8755.52,4181.46
CDO4C: C3C.1 P3C.119 TP11C.1 | length 3787.2
  Top Layer (*.GTL) w10: C3C.1@9912,743 TP11C.1@10042,743 10042,873.7 10161,992.7 10161,2073.91 10270,2182.91 10270,4027.46 10116,4181.46 P3C.119@10055.52,4181.46
CDO5A: C11A.1 P3A.112 TP23A.1 | length 2475.7
  Top Layer (*.GTL) w10: C11A.1@6705,2136 TP23A.1@6860,2136 6971,2247 6971,4110.46 7142,4281.46 P3A.112@7200.4,4281.46
CDO5B: C11B.1 P3B.112 TP23B.1 | length 2475.7
  Top Layer (*.GTL) w10: C11B.1@8005,2136 TP23B.1@8160,2136 8271,2247 8271,4110.46 8442,4281.46 P3B.112@8500.4,4281.46
CDO5C: C11C.1 P3C.112 TP23C.1 | length 2475.7
  Top Layer (*.GTL) w10: C11C.1@9305,2136 TP23C.1@9460,2136 9571,2247 9571,4110.46 9742,4281.46 P3C.112@9800.4,4281.46
CDO6A: C18A.1 P3A.148 TP30A.1 | length 3425.7
  Top Layer (*.GTL) w10: C18A.1@6705,736 TP30A.1@6860,736 6860,866.7 6979,985.7 6979,2066.91 7111,2198.91 7111,3800.46 7142,3831.46 P3A.148@7200.4,3831.46
CDO6B: C18B.1 P3B.148 TP30B.1 | length 3425.7
  Top Layer (*.GTL) w10: C18B.1@8005,736 TP30B.1@8160,736 8160,866.7 8279,985.7 8279,2066.91 8411,2198.91 8411,3800.46 8442,3831.46 P3B.148@8500.4,3831.46
CDO6C: C18C.1 P3C.148 TP30C.1 | length 3425.7
  Top Layer (*.GTL) w10: C18C.1@9305,736 TP30C.1@9460,736 9460,866.7 9579,985.7 9579,2066.91 9711,2198.91 9711,3800.46 9742,3831.46 P3C.148@9800.4,3831.46
CDO7A: C16A.1 P3A.138 TP28A.1 | length 3155.7
  Top Layer (*.GTL) w10: C16A.1@6700,1136 TP28A.1@6860,1136 6860,1266.7 6951,1357.7 6951,2078.51 7071,2198.51 7071,3885.46 7142,3956.46 P3A.138@7200.4,3956.46
CDO7B: C16B.1 P3B.138 TP28B.1 | length 3155.7
  Top Layer (*.GTL) w10: C16B.1@8000,1136 TP28B.1@8160,1136 8160,1266.7 8251,1357.7 8251,2078.51 8371,2198.51 8371,3885.46 8442,3956.46 P3B.138@8500.4,3956.46
CDO7C: C16C.1 P3C.138 TP28C.1 | length 3155.7
  Top Layer (*.GTL) w10: C16C.1@9300,1136 TP28C.1@9460,1136 9460,1266.7 9551,1357.7 9551,2078.51 9671,2198.51 9671,3885.46 9742,3956.46 P3C.138@9800.4,3956.46
CDO8A: C14A.1 P3A.128 TP26A.1 | length 2880.7
  Top Layer (*.GTL) w10: C14A.1@6700,1536 TP26A.1@6860,1536 6860,1666.7 6923,1729.7 6923,2090.11 7031,2198.11 7031,3970.46 7142,4081.46 P3A.128@7200.4,4081.46
CDO8B: C14B.1 P3B.128 TP26B.1 | length 2880.7
  Top Layer (*.GTL) w10: C14B.1@8000,1536 TP26B.1@8160,1536 8160,1666.7 8223,1729.7 8223,2090.11 8331,2198.11 8331,3970.46 8442,4081.46 P3B.128@8500.4,4081.46
CDO8C: C14C.1 P3C.128 TP26C.1 | length 2880.7
  Top Layer (*.GTL) w10: C14C.1@9300,1536 TP26C.1@9460,1536 9460,1666.7 9523,1729.7 9523,2090.11 9631,2198.11 9631,3970.46 9742,4081.46 P3C.128@9800.4,4081.46
CDO9A: C12A.1 P3A.118 TP24A.1 | length 2600.7
  Top Layer (*.GTL) w10: C12A.1@6705,1936 TP24A.1@6860,1936 6860,2066.7 6991,2197.7 6991,4055.46 7142,4206.46 P3A.118@7200.4,4206.46
CDO9B: C12B.1 P3B.118 TP24B.1 | length 2600.7
  Top Layer (*.GTL) w10: C12B.1@8005,1936 TP24B.1@8160,1936 8160,2066.7 8291,2197.7 8291,4055.46 8442,4206.46 P3B.118@8500.4,4206.46
CDO9C: C12C.1 P3C.118 TP24C.1 | length 2600.7
  Top Layer (*.GTL) w10: C12C.1@9305,1936 TP24C.1@9460,1936 9460,2066.7 9591,2197.7 9591,4055.46 9742,4206.46 P3C.118@9800.4,4206.46
CDO10A: C2A.1 P3A.113 TP10A.1 | length 4078.7
  Top Layer (*.GTL) w10: C2A.1@7312,543 TP10A.1@7442,543 7442,673.7 7491,722.7 7491,902.9 7575,986.9 7575,2068.11 7690,2183.11 7690,4082.46 7516,4256.46 P3A.113@7455.52,4256.46
CDO10B: C2B.1 P3B.113 TP10B.1 | length 4078.7
  Top Layer (*.GTL) w10: C2B.1@8612,543 TP10B.1@8742,543 8742,673.7 8791,722.7 8791,902.9 8875,986.9 8875,2068.11 8990,2183.11 8990,4082.46 8816,4256.46 P3B.113@8755.52,4256.46
CDO10C: C2C.1 P3C.113 TP10C.1 | length 4078.7
  Top Layer (*.GTL) w10: C2C.1@9912,543 TP10C.1@10042,543 10042,673.7 10091,722.7 10091,902.9 10175,986.9 10175,2068.11 10290,2183.11 10290,4082.46 10116,4256.46 P3C.113@10055.52,4256.46
CDO11A: C1A.1 P3A.109 TP9A.1 | length 4345.3
  Top Layer (*.GTL) w10: C1A.1@7312,343 TP9A.1@7442,343 7442,473.7 7505,536.7 7505,897.11 7589,981.11 7589,2062.31 7710,2183.31 7710,4112.46 7516,4306.46 P3A.109@7455.52,4306.46
CDO11B: C1B.1 P3B.109 TP9B.1 | length 4345.3
  Top Layer (*.GTL) w10: C1B.1@8612,343 TP9B.1@8742,343 8742,473.7 8805,536.7 8805,897.11 8889,981.11 8889,2062.31 9010,2183.31 9010,4112.46 8816,4306.46 P3B.109@8755.52,4306.46
CDO11C: C1C.1 P3C.109 TP9C.1 | length 4345.3
  Top Layer (*.GTL) w10: C1C.1@9912,343 TP9C.1@10042,343 10042,473.7 10105,536.7 10105,897.11 10189,981.11 10189,2062.31 10310,2183.31 10310,4112.46 10116,4306.46 P3C.109@10055.52,4306.46
CDO12A: C19A.1 P3A.152 TP31A.1 | length 3575.7
  Top Layer (*.GTL) w10: C19A.1@6705,536 TP31A.1@6860,536 6860,666.7 6909,715.7 6909,895.9 6993,979.9 6993,2061.11 7131,2199.11 7131,3770.46 7142,3781.46 P3A.152@7200.4,3781.46
CDO12B: C19B.1 P3B.152 TP31B.1 | length 3575.7
  Top Layer (*.GTL) w10: C19B.1@8005,536 TP31B.1@8160,536 8160,666.7 8209,715.7 8209,895.9 8293,979.9 8293,2061.11 8431,2199.11 8431,3770.46 8442,3781.46 P3B.152@8500.4,3781.46
CDO12C: C19C.1 P3C.152 TP31C.1 | length 3575.7
  Top Layer (*.GTL) w10: C19C.1@9305,536 TP31C.1@9460,536 9460,666.7 9509,715.7 9509,895.9 9593,979.9 9593,2061.11 9731,2199.11 9731,3770.46 9742,3781.46 P3C.152@9800.4,3781.46
CDO13A: C17A.1 P3A.142 TP29A.1 | length 3300.7
  Top Layer (*.GTL) w10: C17A.1@6705,936 TP29A.1@6860,936 6860,1066.7 6965,1171.7 6965,2072.71 7091,2198.71 7091,3855.46 7142,3906.46 P3A.142@7200.4,3906.46
CDO13B: C17B.1 P3B.142 TP29B.1 | length 3300.7
  Top Layer (*.GTL) w10: C17B.1@8005,936 TP29B.1@8160,936 8160,1066.7 8265,1171.7 8265,2072.71 8391,2198.71 8391,3855.46 8442,3906.46 P3B.142@8500.4,3906.46
CDO13C: C17C.1 P3C.142 TP29C.1 | length 3300.7
  Top Layer (*.GTL) w10: C17C.1@9305,936 TP29C.1@9460,936 9460,1066.7 9565,1171.7 9565,2072.71 9691,2198.71 9691,3855.46 9742,3906.46 P3C.142@9800.4,3906.46
CDO14A: C15A.1 P3A.132 TP27A.1 | length 3032.7
  Top Layer (*.GTL) w10: C15A.1@6697.96,1336 TP27A.1@6860,1336 6860,1466.7 6937,1543.7 6937,2084.31 7051,2198.31 7051,3940.46 7142,4031.46 P3A.132@7200.4,4031.46
CDO14B: C15B.1 P3B.132 TP27B.1 | length 3032.7
  Top Layer (*.GTL) w10: C15B.1@7997.96,1336 TP27B.1@8160,1336 8160,1466.7 8237,1543.7 8237,2084.31 8351,2198.31 8351,3940.46 8442,4031.46 P3B.132@8500.4,4031.46
CDO14C: C15C.1 P3C.132 TP27C.1 | length 3032.7
  Top Layer (*.GTL) w10: C15C.1@9297.96,1336 TP27C.1@9460,1336 9460,1466.7 9537,1543.7 9537,2084.31 9651,2198.31 9651,3940.46 9742,4031.46 P3C.132@9800.4,4031.46
CDO15A: C13A.1 P3A.122 TP25A.1 | length 2750.7
  Top Layer (*.GTL) w10: C13A.1@6705,1736 TP25A.1@6860,1736 6860,1866.7 6909,1915.7 6909,2095.9 7011,2197.9 7011,4025.46 7142,4156.46 P3A.122@7200.4,4156.46
CDO15B: C13B.1 P3B.122 TP25B.1 | length 2750.7
  Top Layer (*.GTL) w10: C13B.1@8005,1736 TP25B.1@8160,1736 8160,1866.7 8209,1915.7 8209,2095.9 8311,2197.9 8311,4025.46 8442,4156.46 P3B.122@8500.4,4156.46
CDO15C: C13C.1 P3C.122 TP25C.1 | length 2750.7
  Top Layer (*.GTL) w10: C13C.1@9305,1736 TP25C.1@9460,1736 9460,1866.7 9509,1915.7 9509,2095.9 9611,2197.9 9611,4025.46 9742,4156.46 P3C.122@9800.4,4156.46
CDO16A: C10A.1 P3A.153 TP18A.1 | length 1876.8
  Top Layer (*.GTL) w10: C10A.1@7305,2086 7362,2143 TP18A.1@7442,2143 7530,2231 7530,3742.46 7516,3756.46 P3A.153@7455.52,3756.46
CDO16B: C10B.1 P3B.153 TP18B.1 | length 1876.8
  Top Layer (*.GTL) w10: C10B.1@8605,2086 8662,2143 TP18B.1@8742,2143 8830,2231 8830,3742.46 8816,3756.46 P3B.153@8755.52,3756.46
CDO16C: C10C.1 P3C.153 TP18C.1 | length 1876.8
  Top Layer (*.GTL) w10: C10C.1@9905,2086 9962,2143 TP18C.1@10042,2143 10130,2231 10130,3742.46 10116,3756.46 P3C.153@10055.52,3756.46
CDO17A: C8A.1 P3A.143 TP16A.1 | length 2404.3
  Top Layer (*.GTL) w10: C8A.1@7312,1743 TP16A.1@7442,1743 7442,1873.7 7491,1922.7 7491,2102.9 7570,2181.9 7570,3827.46 7516,3881.46 P3A.143@7455.52,3881.46
CDO17B: C8B.1 P3B.143 TP16B.1 | length 2404.3
  Top Layer (*.GTL) w10: C8B.1@8612,1743 TP16B.1@8742,1743 8742,1873.7 8791,1922.7 8791,2102.9 8870,2181.9 8870,3827.46 8816,3881.46 P3B.143@8755.52,3881.46
CDO17C: C8C.1 P3C.143 TP16C.1 | length 2404.3
  Top Layer (*.GTL) w10: C8C.1@9912,1743 TP16C.1@10042,1743 10042,1873.7 10091,1922.7 10091,2102.9 10170,2181.9 10170,3827.46 10116,3881.46 P3C.143@10055.52,3881.46
CDO18A: C6A.1 P3A.133 TP14A.1 | length 2962.5
  Top Layer (*.GTL) w10: C6A.1@7312,1343 TP14A.1@7442,1343 7442,1473.7 7519,1550.7 7519,2091.31 7610,2182.31 7610,3912.46 7516,4006.46 P3A.133@7455.52,4006.46
CDO18B: C6B.1 P3B.133 TP14B.1 | length 2962.5
  Top Layer (*.GTL) w10: C6B.1@8612,1343 TP14B.1@8742,1343 8742,1473.7 8819,1550.7 8819,2091.31 8910,2182.31 8910,3912.46 8816,4006.46 P3B.133@8755.52,4006.46
CDO18C: C6C.1 P3C.133 TP14C.1 | length 2962.5
  Top Layer (*.GTL) w10: C6C.1@9912,1343 TP14C.1@10042,1343 10042,1473.7 10119,1550.7 10119,2091.31 10210,2182.31 10210,3912.46 10116,4006.46 P3C.133@10055.52,4006.46
CDO19A: C4A.1 P3A.123 TP12A.1 | length 3520.6
  Top Layer (*.GTL) w10: C4A.1@7312,943 TP12A.1@7442,943 7442,1073.7 7547,1178.7 7547,2079.71 7650,2182.71 7650,3997.46 7516,4131.46 P3A.123@7455.52,4131.46
CDO19B: C4B.1 P3B.123 TP12B.1 | length 3520.6
  Top Layer (*.GTL) w10: C4B.1@8612,943 TP12B.1@8742,943 8742,1073.7 8847,1178.7 8847,2079.71 8950,2182.71 8950,3997.46 8816,4131.46 P3B.123@8755.52,4131.46
CDO19C: C4C.1 P3C.123 TP12C.1 | length 3520.6
  Top Layer (*.GTL) w10: C4C.1@9912,943 TP12C.1@10042,943 10042,1073.7 10147,1178.7 10147,2079.71 10250,2182.71 10250,3997.46 10116,4131.46 P3C.123@10055.52,4131.46
CH1A: P1A.17 Q6A.2 TP1A.1 | length 3942.4
  Top Layer (*.GTL) w10: TP1A.1@677.96,1449.02 608.66,1449.02 180.96,1876.72 180.96,4204.02 338.72,4361.77 Q6A.2@396.2,4361.77 500.2,4361.77 588.2,4273.77 588.2,3951.77 610.96,3929.02 P1A.17@688.65,3929.02
CH1B: P1B.17 Q6B.2 TP1B.1 | length 3942.4
  Top Layer (*.GTL) w10: TP1B.1@1977.96,1449.02 1908.66,1449.02 1480.96,1876.72 1480.96,4204.02 1638.72,4361.77 Q6B.2@1696.2,4361.77 1800.2,4361.77 1888.2,4273.77 1888.2,3951.77 1910.96,3929.02 P1B.17@1988.65,3929.02
CH1C: P1C.17 Q6C.2 TP1C.1 | length 3942.4
  Top Layer (*.GTL) w10: TP1C.1@3277.96,1449.02 3208.66,1449.02 2780.96,1876.72 2780.96,4204.02 2938.72,4361.77 Q6C.2@2996.2,4361.77 3100.2,4361.77 3161,4300.98 3161,3978.98 3210.96,3929.02 P1C.17@3288.65,3929.02
CH2A: P1A.13 Q5A.2 TP2A.1 | length 2998.2
  Top Layer (*.GTL) w10: TP2A.1@477.96,1649.02 213.96,1913.02 213.96,3935.02 340.72,4061.77 Q5A.2@396.2,4061.77 449.2,4061.77 631.96,3879.02 P1A.13@688.65,3879.02
CH2B: P1B.13 Q5B.2 TP2B.1 | length 2998.2
  Top Layer (*.GTL) w10: TP2B.1@1777.96,1649.02 1513.96,1913.02 1513.96,3935.02 1640.72,4061.77 Q5B.2@1696.2,4061.77 1749.2,4061.77 1931.96,3879.02 P1B.13@1988.65,3879.02
CH2C: P1C.13 Q5C.2 TP2C.1 | length 2998.2
  Top Layer (*.GTL) w10: TP2C.1@3077.96,1649.02 2813.96,1913.02 2813.96,3935.02 2940.72,4061.77 Q5C.2@2996.2,4061.77 3049.2,4061.77 3231.96,3879.02 P1C.13@3288.65,3879.02
CH3A: P1A.7 Q4A.2 TP3A.1 | length 2527.3
  Top Layer (*.GTL) w10: TP3A.1@677.96,1849.02 608.66,1849.02 253.96,2203.72 253.96,3669.78 345.95,3761.77 Q4A.2@396.2,3761.77 468.2,3761.77 510.45,3804.02 P1A.7@688.65,3804.02
CH3B: P1B.7 Q4B.2 TP3B.1 | length 2527.3
  Top Layer (*.GTL) w10: TP3B.1@1977.96,1849.02 1908.66,1849.02 1553.96,2203.72 1553.96,3669.78 1645.95,3761.77 Q4B.2@1696.2,3761.77 1768.2,3761.77 1810.45,3804.02 P1B.7@1988.65,3804.02
CH3C: P1C.7 Q4C.2 TP3C.1 | length 2527.3
  Top Layer (*.GTL) w10: TP3C.1@3277.96,1849.02 3208.66,1849.02 2853.96,2203.72 2853.96,3669.78 2945.95,3761.77 Q4C.2@2996.2,3761.77 3068.2,3761.77 3110.45,3804.02 P1C.7@3288.65,3804.02
CH4A: P1A.3 Q3A.2 TP4A.1 | length 2116.1
  Top Layer (*.GTL) w10: TP4A.1@477.96,2049.02 299.72,2227.26 299.72,3461.77 Q3A.2@396.2,3461.77 470.2,3461.77 518.2,3509.77 518.2,3713.77 558.45,3754.02 P1A.3@688.65,3754.02
CH4B: P1B.3 Q3B.2 TP4B.1 | length 2116.1
  Top Layer (*.GTL) w10: TP4B.1@1777.96,2049.02 1599.72,2227.26 1599.72,3461.77 Q3B.2@1696.2,3461.77 1770.2,3461.77 1818.2,3509.77 1818.2,3713.77 1858.45,3754.02 P1B.3@1988.65,3754.02
CH4C: P1C.3 Q3C.2 TP4C.1 | length 2116.1
  Top Layer (*.GTL) w10: TP4C.1@3077.96,2049.02 2899.72,2227.26 2899.72,3461.77 Q3C.2@2996.2,3461.77 3070.2,3461.77 3118.2,3509.77 3118.2,3713.77 3158.45,3754.02 P1C.3@3288.65,3754.02
CLK_0_N: P1A.153 P2.5 | length 8662.5
  Top Layer (*.GTL) w5: v1(75,3655) 75,5670 416.58,6011.58 P1A.153@700.4,6011.58 ; v1(5795,3780) 5796.26,3781.26 P2.5@5900.4,3781.26
  Bottom Layer (*.GBL) w5: v1(75,3655) 75,3660 100,3685 110,3685 3047.27,3685 3142.27,3780 v1(5795,3780)
CLK_0_P: P1A.151 P2.3 | length 8591.6
  Top Layer (*.GTL) w5: v1@100,3655 100,5659.64 426.93,5986.58 P1A.151@700.4,5986.58 ; v1(5810,3755) 5811.26,3756.26 P2.3@5900.4,3756.26
  Bottom Layer (*.GBL) w5: v1@100,3655 v1(105,3655) 105,3660 110,3665 110,3675 3050,3675 3130,3755 v1(5810,3755)
CLK_1_N: P1B.153 P2.6 | length 7930.2
  Top Layer (*.GTL) w5: v1(1320,3645) 1320,5595 1736.58,6011.58 P1B.153@2000.4,6011.58 ; P2.6@6155.52,3781.26 6268.74,3781.26 v1(6270,3780) v1@6265,3775
  Bottom Layer (*.GBL) w5: v1(1320,3645) 1340,3665 6095.36,3665 6211.62,3781.26 v1@6268.74,3781.26
CLK_1_P: P1B.151 P2.4 | length 7840.5
  Top Layer (*.GTL) w5: v1(1345,3625) 1345,5584.64 1746.93,5986.58 P1B.151@2000.4,5986.58 ; P2.4@6155.52,3756.26 6248.74,3756.26 v1(6250,3755)
  Bottom Layer (*.GBL) w5: v1(1345,3625) 1345,3633.74 1365,3653.74 6121.23,3653.74 6222.49,3755 v1(6250,3755)